# Altium PCB dv_power.PcbDoc
Units mm, origin at the board's own origin, x right, y up, seen from the top; angles counter-clockwise.
Board outline 86 x 62 mm, 4 copper layers (Top Layer, Ground, Power, Bottom Layer), stack 1.781 mm thick; 25 components, 23 nets, 162 pads, 67 vias.
Unrouted connection lines stored in the file: 13.
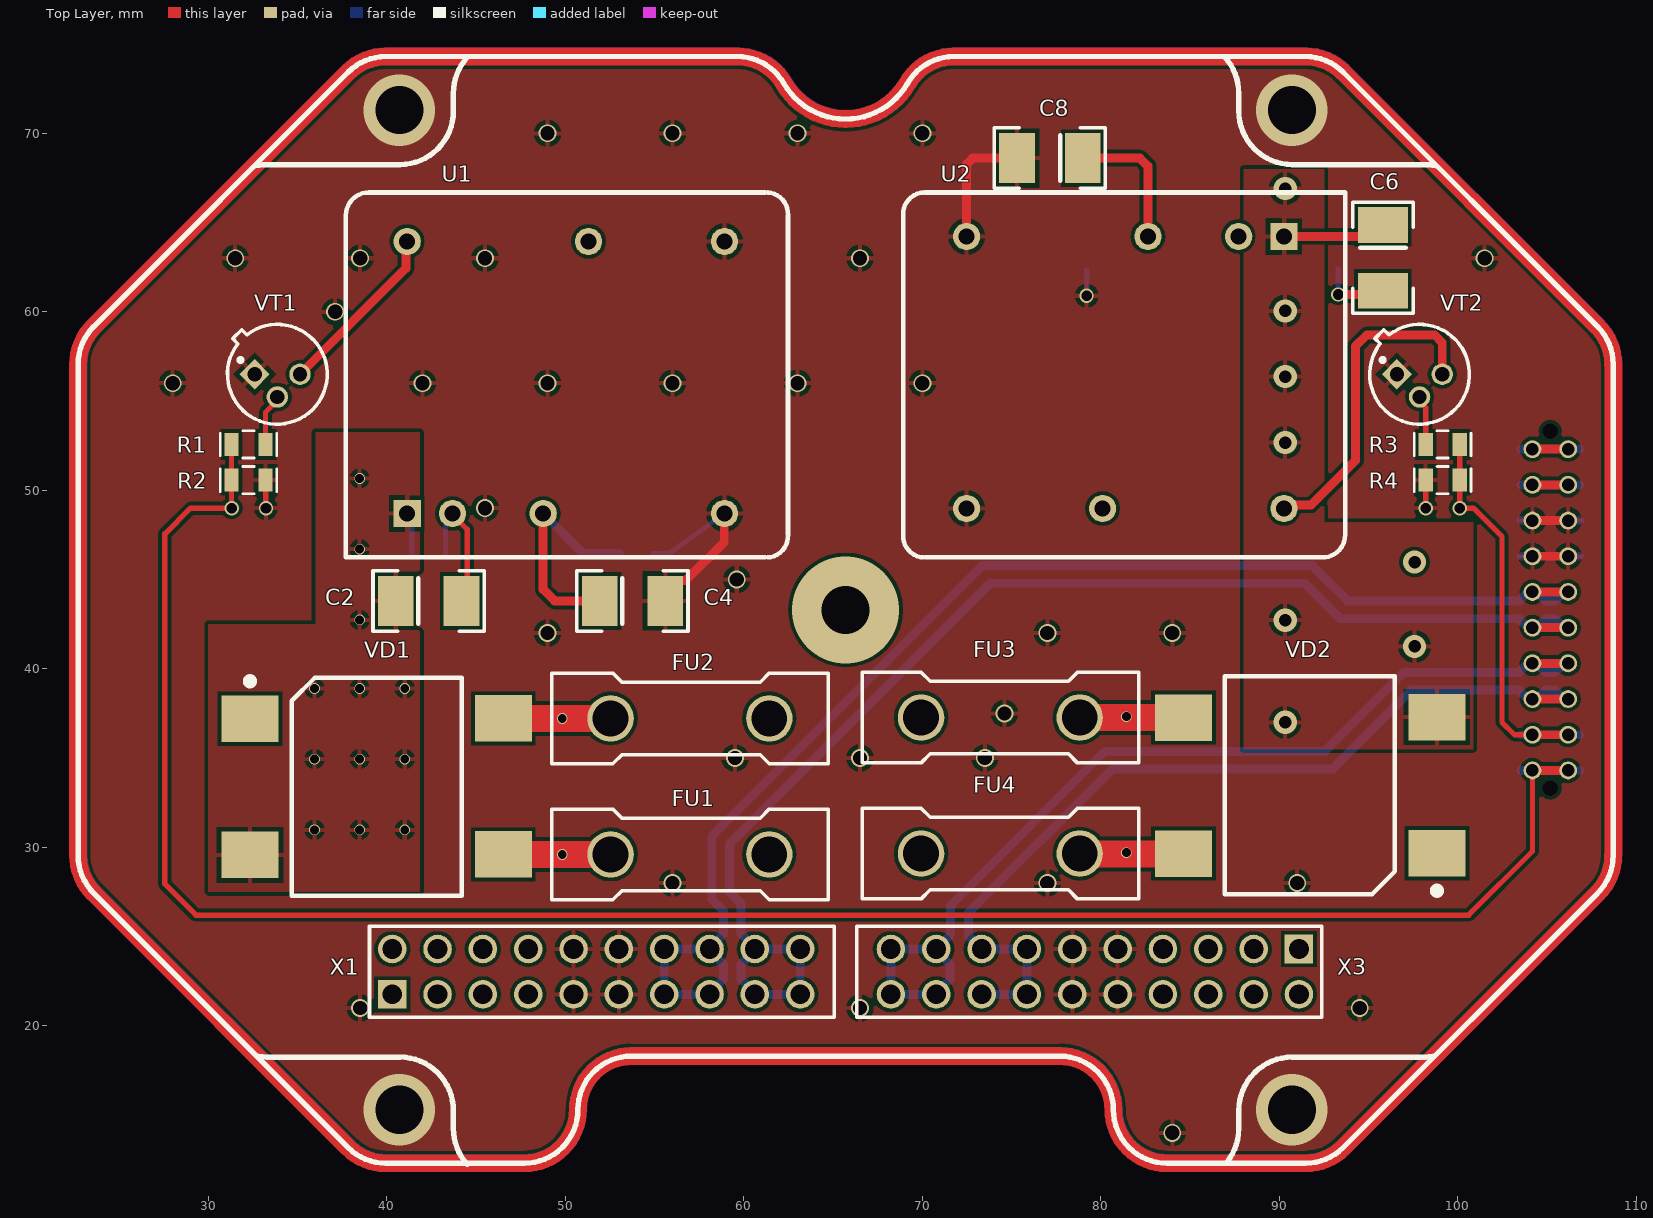
[diagram p0: Top Layer view]
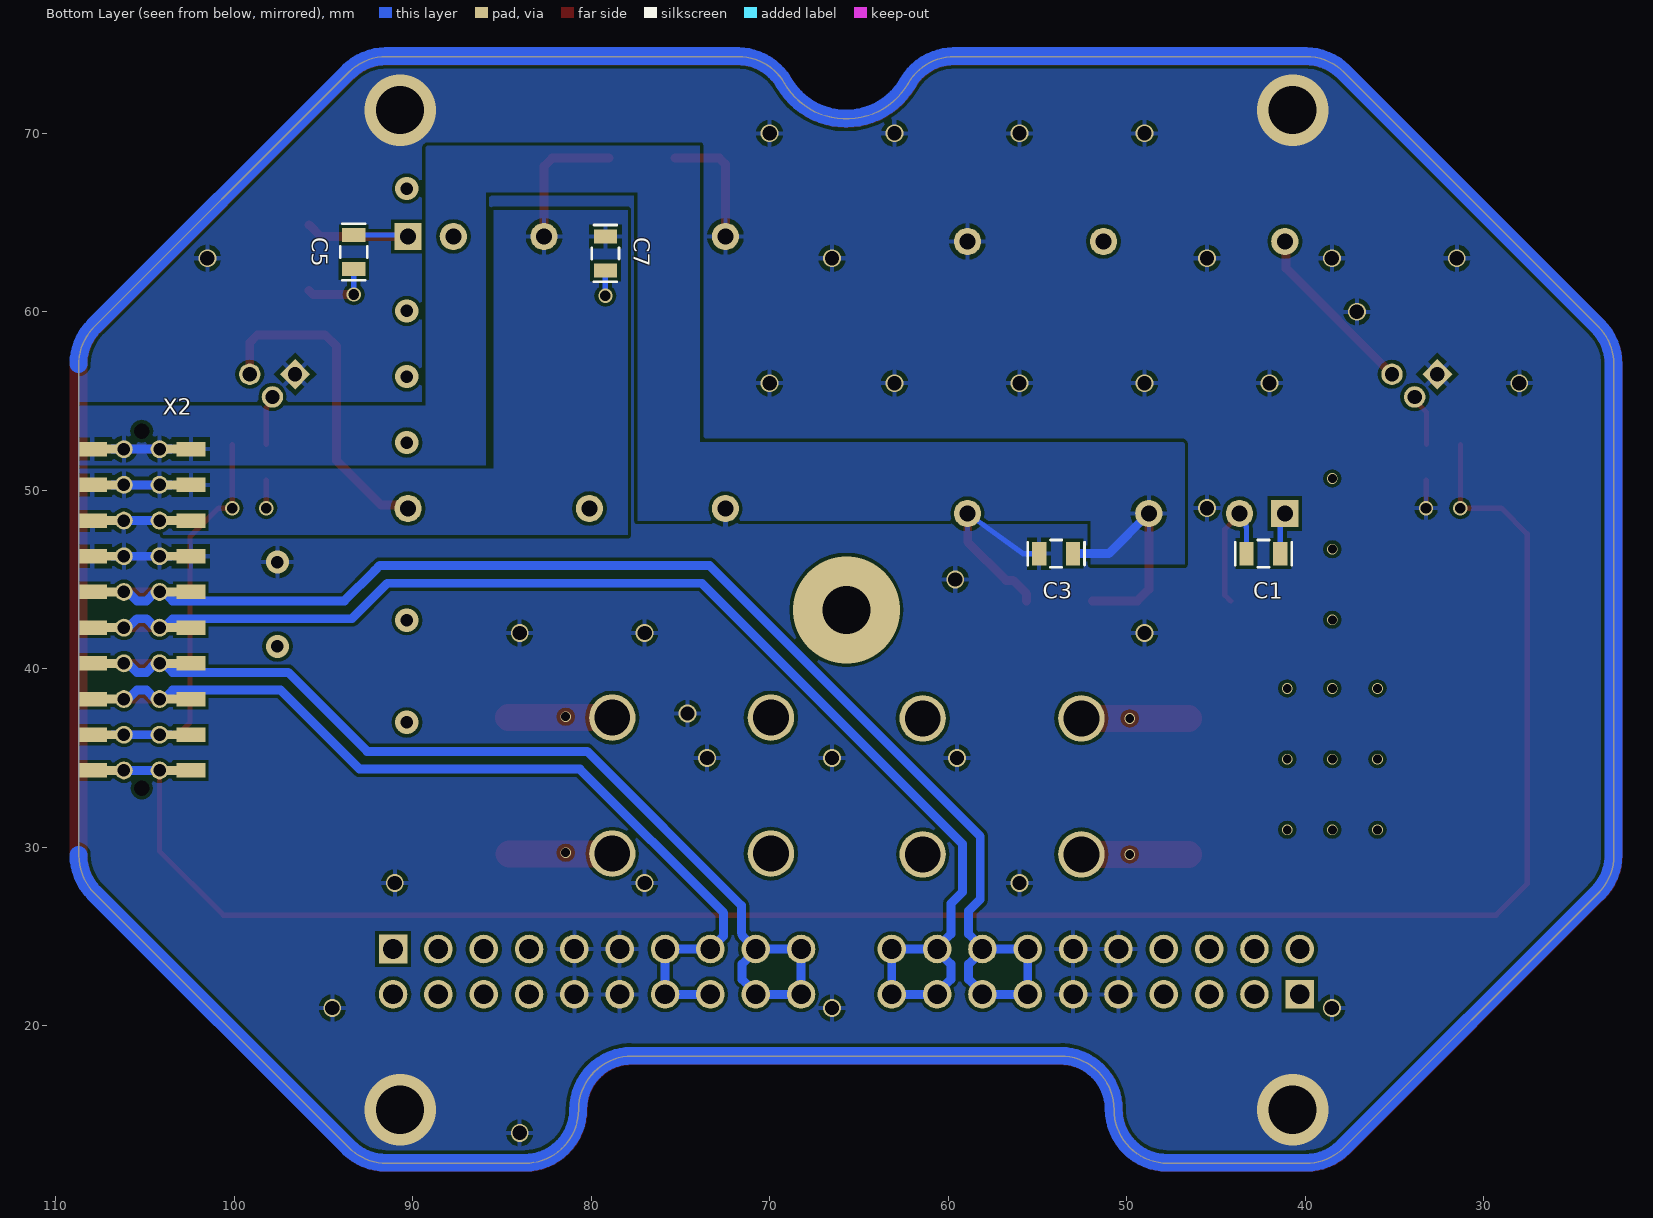
[diagram p1: Bottom Layer view, seen from below]
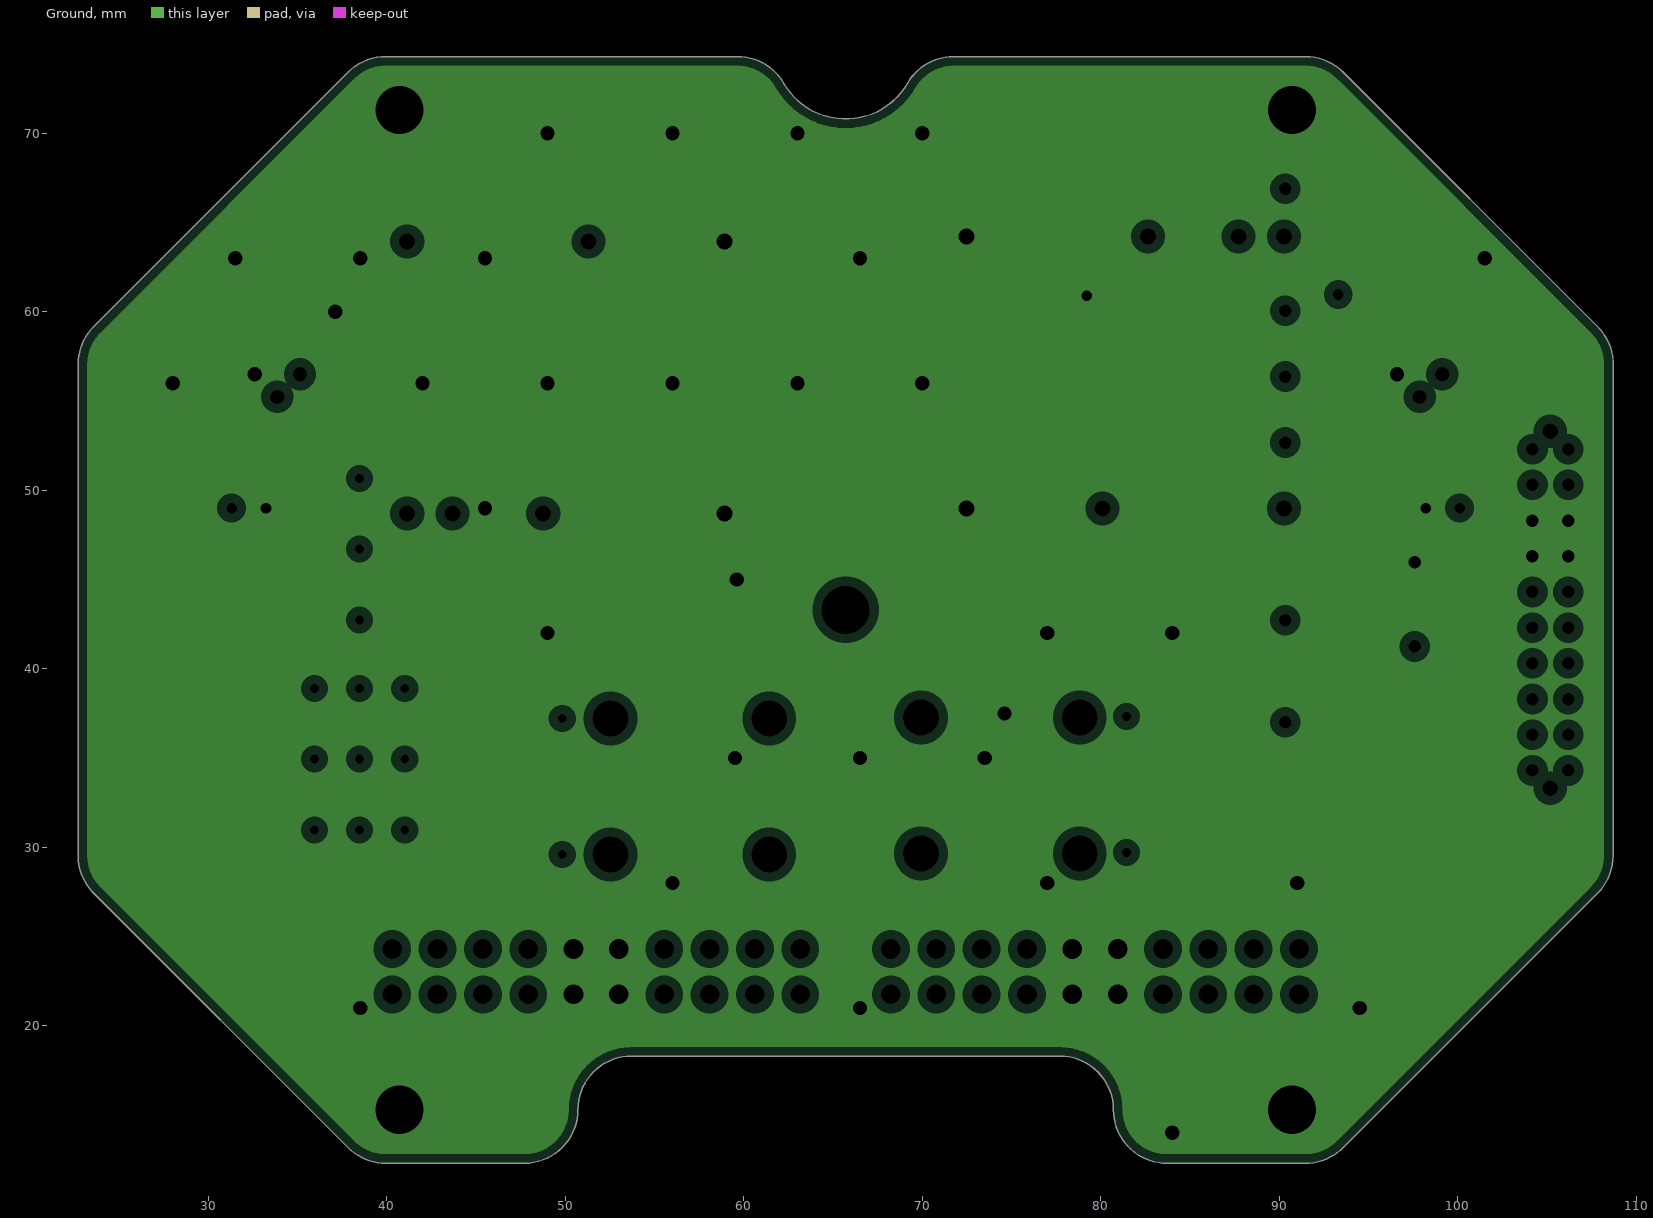
[diagram p2: Ground, clearances drawn from the general rule]
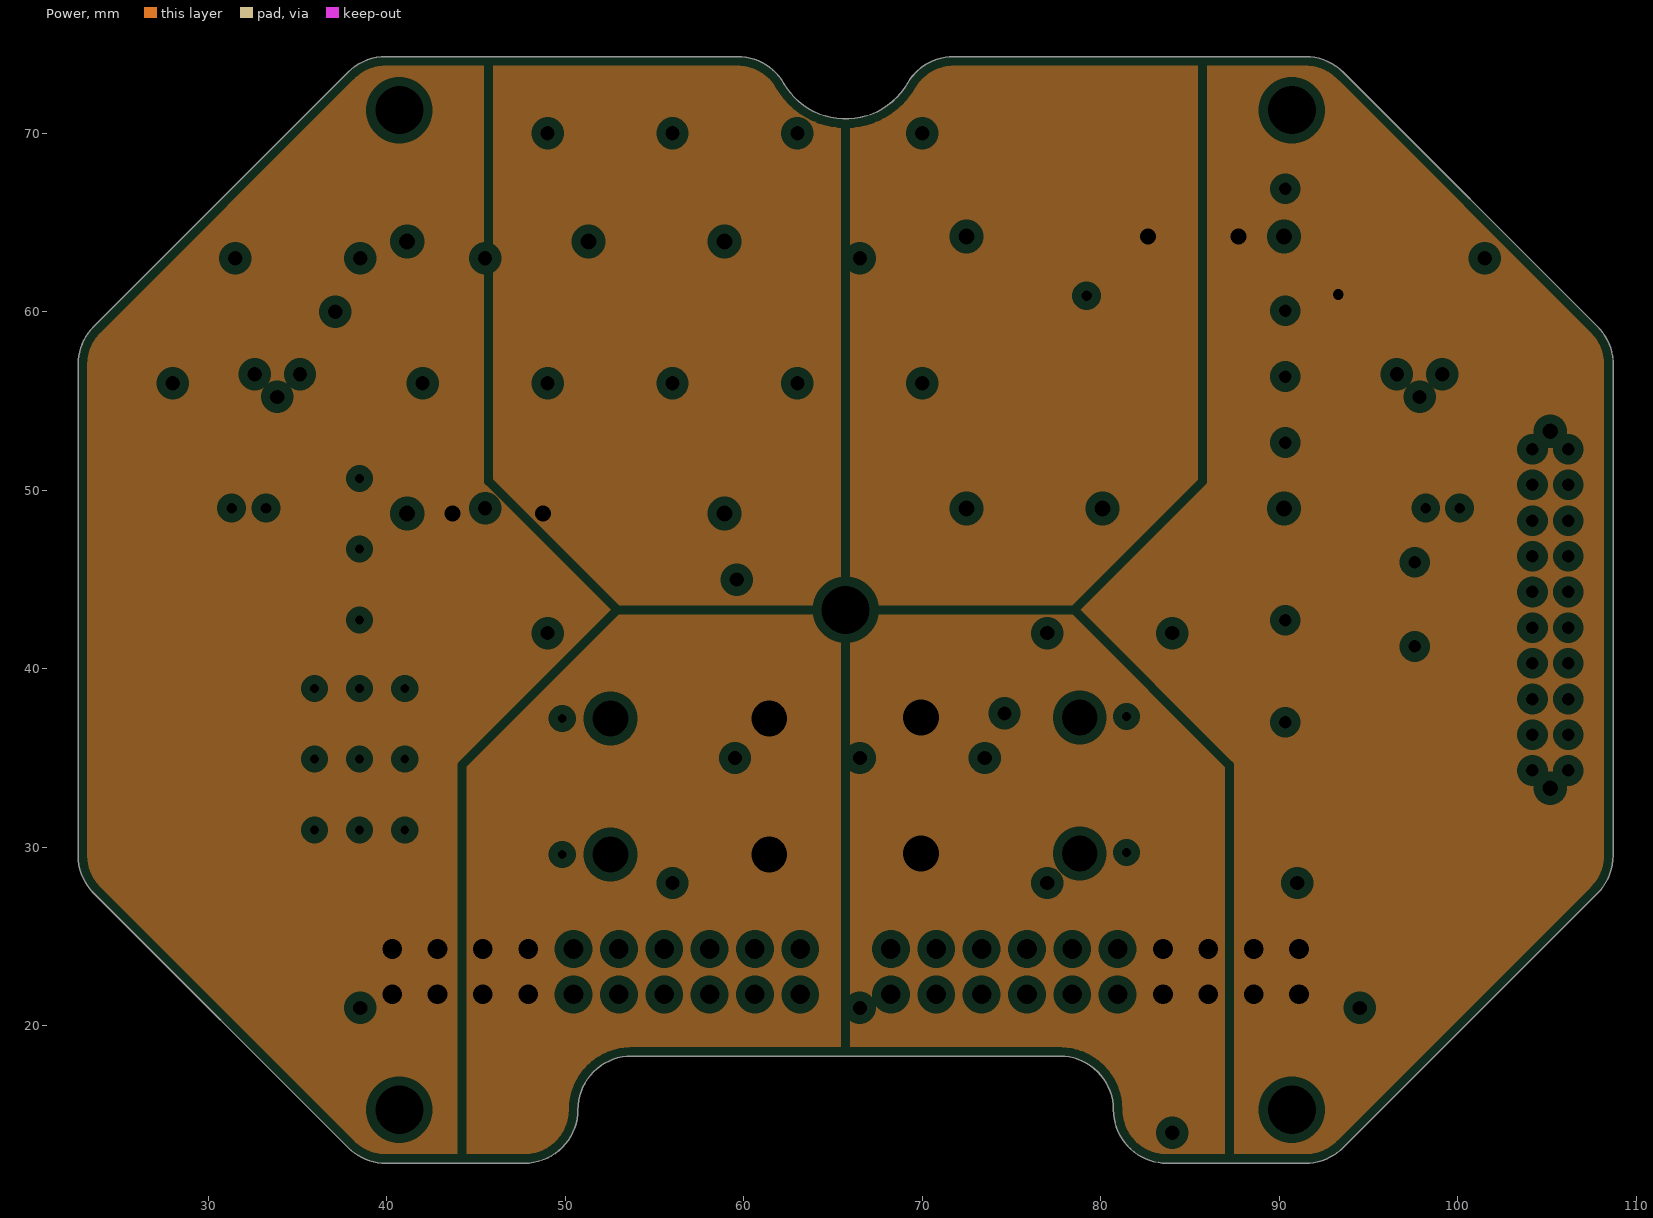
[diagram p3: Power, clearances drawn from the general rule]
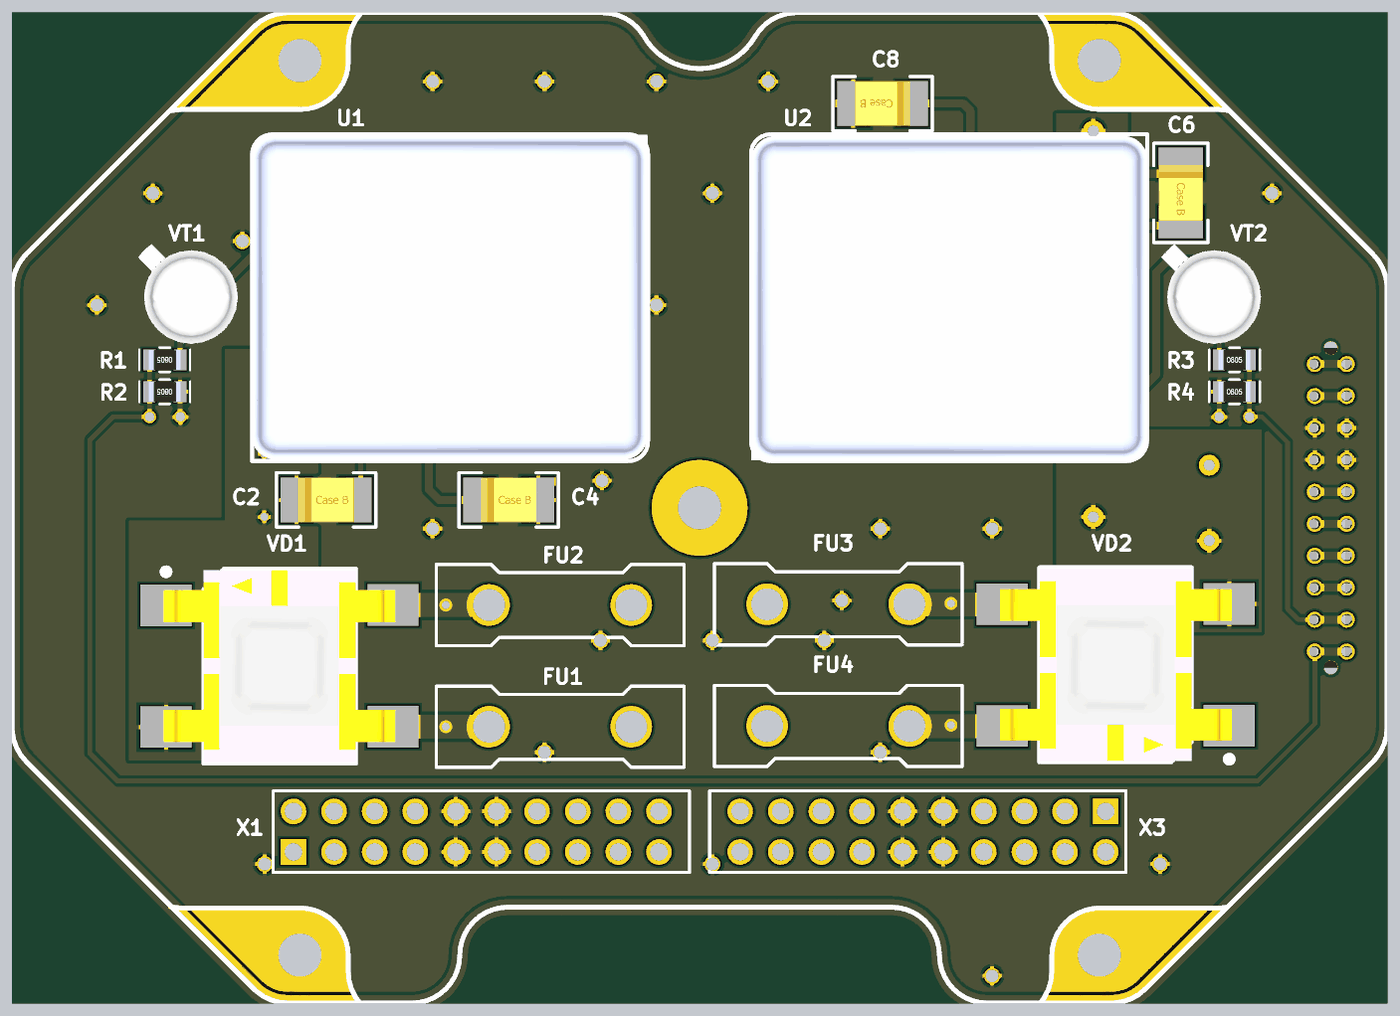
[diagram p4: 3D render of the assembled board from above, using the file's embedded part models]
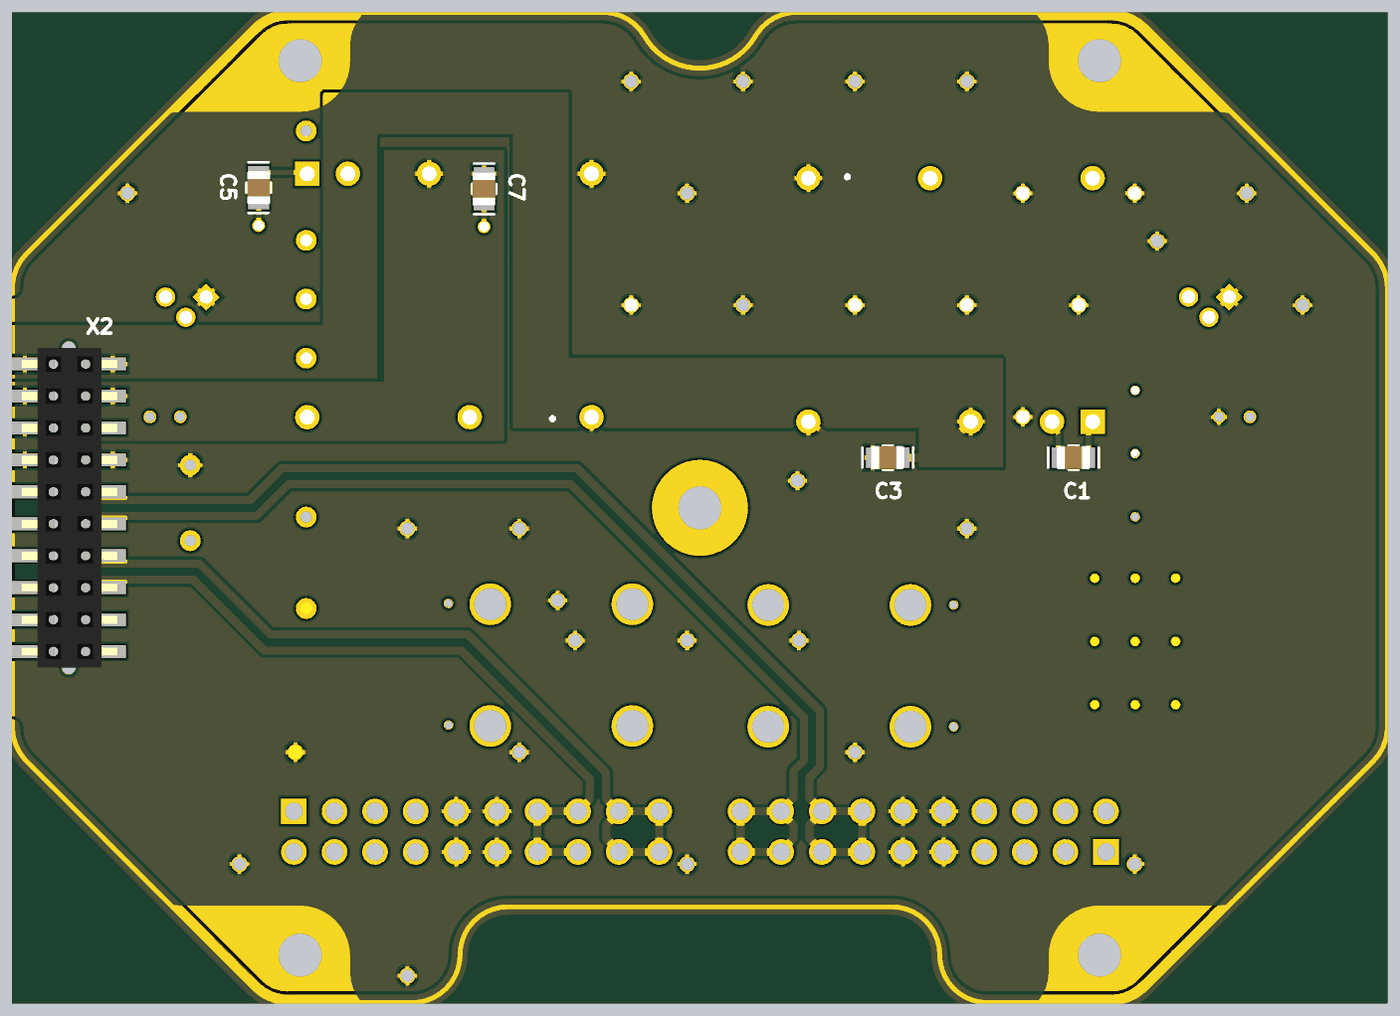
[diagram p5: 3D render of the assembled board from below, using the file's embedded part models]

## Layer stack, top to bottom
Top Solder: solder mask 0.0254, SM-001, Dk 4
Top Layer: signal copper 0.035
Dielectric 2: prepreg 0.0711, PP-006, Dk 4.1
Ground: plane copper 0.035, net GND
Dielectric 1: core 1.4986, Core-043, Dk 4.3
Power: plane copper 0.035, net (Multiple Nets)
Dielectric 3: prepreg 0.0711, PP-006, Dk 4.1
Bottom Layer: signal copper 0.035
Bottom Solder: solder mask 0.0254, SM-001, Dk 4

## Board outline
39.943,12.3 47.7,12.3 ccw(c47.7,15.3) 50.7,15.3 cw(c53.7,15.3) 53.7,18.3 77.7,18.3 cw(c77.7,15.3) 80.7,15.3 ccw(c83.7,15.3) 83.7,12.3 91.457,12.3 ccw(c91.457,15.3) 93.579,13.179 107.821,27.421 ccw(c105.7,29.543) 108.7,29.543 108.7,57.057 ccw(c105.7,57.057) 107.821,59.179 93.579,73.421 ccw(c91.457,71.3) 91.457,74.3 71.762,74.3 ccw(c71.762,71.3) 69.164,72.8 cw(c65.7,74.8) 62.236,72.8 ccw(c59.638,71.3) 59.638,74.3 39.943,74.3 ccw(c39.943,71.3) 37.821,73.421 23.579,59.179 ccw(c25.7,57.057) 22.7,57.057 22.7,29.543 ccw(c25.7,29.543) 23.579,27.421 37.821,13.179 ccw(c39.943,15.3)

## Design rules (kind name [scope] priority, off if disabled: settings)
Clearance [All] p1: gap=0.2 ignorepadtopadclearanceinfootprint=FALSE
ComponentClearance [All] p1: gap=0 collisioncheckmode=3 verticalgap=0.2 showdistances=FALSE
DiffPairsRouting [All] p1: maxlimit=0.5 minlimit=0.2 mostfreqgap=0.3 toplayer_minwidth=0.2 toplayer_maxwidth=1 toplayer_prefwidth=0.3 bottomlayer_minwidth=0.2 bottomlayer_maxwidth=1 bottomlayer_prefwidth=0.3 maxuncoupledlength=10
HoleSize [All] p1: absolutevalues=TRUE maxlimit=7 minlimit=0.5 maxpercent=80.000 minpercent=20.000
NetAntennae [All] p1 off: netantennaetolerance=0
PlaneClearance [All] p1: clearance=0.508
PlaneConnect [All] p1: planeconnectstyle=Relief reliefexpansion=0.508 reliefentries=4 reliefconductorwidth=0.254 reliefairgap=0.254
PolygonConnect "Mechanical Hole" [(ObjectKind = 'Via') And (AsMM(HoleDiameter) > 1.5) vs IsPoly] p1: connectstyle=Direct reliefconductorwidth=0.254 reliefentries=4 polygonreliefangle="90 Angle" airgapwidth=0.254
PolygonConnect [All] p2: connectstyle=Relief reliefconductorwidth=0.254 reliefentries=4 polygonreliefangle="90 Angle" airgapwidth=0.254
RoutingVias [All] p1: holewidth=0.3 width=0.6 viastyle="Through Hole" minholewidth=0.2 minwidth=0.4 maxholewidth=4 maxwidth=5 useviatemplates=TRUE viatemplateguid#1={8CC3DEFE-2846-4DFB-9B77-7EB525941536} viatemplatename#1=v80h60
SilkToSilkClearance [All] p1: silktosilkclearance=0.2
SilkToSolderMaskClearance SilkToSolderMaskClearance_1 [IsPad] p1: minsilkscreentomaskgap=0.254 clearancetoexposedcopper=TRUE
SilkToSolderMaskClearance [IsPad] p2: minsilkscreentomaskgap=0.2 clearancetoexposedcopper=TRUE
SolderMaskExpansion [All] p1: expansion=0.102 istentingtop=FALSE
Width [All] p1: maxlimit=2 minlimit=0.2 preferedwidth=0.2
22 further rules are at their usual default settings.

## Classes and differential pairs
net class pwr_en[1..2]: pwr_en1 pwr_en2
net class -27V[1..2]: -27V1 -27V2
net class +27V[1..2]: +27V1 +27V2
net class +5V[1..2]: +5V1 +5V2
channel class dv_power_chanel: dv_power_chanel1 dv_power_chanel2
component class dv_power_chanel2: C5 C6 C7 C8 FU3 FU4 R3 R4 U2 VD2 VT2
component class dv_power_chanel1: C1 C2 C3 C4 FU1 FU2 R1 R2 U1 VD1 VT1
component class dv_power: X1 X2 X3
differential pair 1-РЕЗ: +1-РЕЗ-П -1-РЕЗ-О
differential pair 1-ОСН: +1-ОСН-П -1-ОСН-О

## Components (designator, comment, footprint, x,y, rotation, side; value= is the part's Value field where it differs from the comment)
C1 "K10-79" SMD_C0805 43.286,46.45 r180 bottom value=0,1мкФ
C2 "OS K53-68" SMD_size_B 40.492,43.8 r0 top value=10мкФх50В
C3 "K10-79" SMD_C0805 54.9,46.45 r180 bottom value=0,1мкФ
C4 "OS K53-68" SMD_size_B 51.917,43.8 r0 top value=10мкФх50В
C5 "K10-79" SMD_C0805 93.3,62.4 r90 bottom value=0,1мкФ (schematic designator C1)
C6 "OS K53-68" SMD_size_B 95.8,64.865 r270 top value=10мкФх50В (schematic designator C2)
C7 "K10-79" SMD_C0805 79.2,62.319 r90 bottom value=0,1мкФ (schematic designator C3)
C8 "OS K53-68" SMD_size_B 78.983,68.61 r180 top value=10мкФх50В (schematic designator C4)
FU1 "VP1-2" VP1-2 61.422,29.6 r180 top value=0.25A
FU2 "VP1-2" VP1-2 61.422,37.22 r180 top value=0.25A
FU3 "VP1-2" VP1-2 69.925,37.267 r0 top value=0.25A (schematic designator FU1)
FU4 "VP1-2" VP1-2 69.925,29.647 r0 top value=0.25A (schematic designator FU2)
R1 "OSM R1-12" SMD_0805 33.195,52.569 r180 top value=1к
R2 "OSM R1-12" SMD_0805 33.195,50.569 r180 top value=1к
R3 "OSM R1-12" SMD_0805 98.199,52.569 r0 top value=1к (schematic designator R1)
R4 "OSM R1-12" SMD_0805 98.199,50.569 r0 top value=1к (schematic designator R2)
U1 "SMPV 1.5 5.0 OV" SLH28xx 41.136,48.7 r90 top
U2 "SMPV 1.5 5.0 OV" SLH28xx 90.258,64.219 r270 top (schematic designator U1)
VD1 "2D222VS \"OSM\"" 4116.4-3_offcut 32.325,37.2 r0 top
VD2 "2D222VS \"OSM\"" 4116.4-3_offcut 98.825,29.667 r180 top (schematic designator VD1)
VT1 "2T3117A" TO-18 32.592,56.5 r0 top
VT2 "2T3117A" TO-18 96.584,56.5 r0 top (schematic designator VT1)
X1 "Header 2X20" PBD-20 40.297,21.76 r0 top
X2 "Header 2X20" SD87340-20 102.428,52.304 r180 bottom
X3 "Header 2X20" PBD-20 91.097,24.3 r180 top

## Footprints (in the part's own frame and the unit in brackets; to place one, negate y for a bottom-side part, rotate by r counter-clockwise, add the part's x,y. Pads: shape width x height; smd on the part's side, far side on the other; paste and mask are expansions set on the pad)
4116.4-3_offcut [mm]
  rect 3.2x2.6 smd: 2(0,0) 8(0,-7.62) 11(14.2,-7.6) 17(14.2,0.02)
  silkscreen extent -0.2,-9.91 11.88,2.3, body extent -0.15,-9.8 14.35,2.2, height 3.35
PBD-20 [mm]
  rect 1.6x1.6 hole 1.1: 1(0,0)
  round 1.6 hole 1.1: 2(0,2.54) 3(2.54,0) 4(2.54,2.54) 5(5.08,0) 6(5.08,2.54) 7(7.62,0) 8(7.62,2.54) 9(10.16,0) 10(10.16,2.54) 11(12.7,0) 12(12.7,2.54) 13(15.24,0) 14(15.24,2.54) 15(17.78,0) 16(17.78,2.54) 17(20.32,0) 18(20.32,2.54) 19(22.86,0) 20(22.86,2.54)
  silkscreen extent -1.27,-1.28 24.76,3.82
SD87340-20 [mm]
  round 0 hole 0.85: 0(-2.75,-19) 0(-2.75,1)
  round 1 hole 0.7: 1(-1.75,0) 2(-3.75,0) 3(-1.75,-2) 4(-3.75,-2) 5(-1.75,-4) 6(-3.75,-4) 7(-1.75,-6) 8(-3.75,-6) 9(-1.75,-8) 10(-3.75,-8) 11(-1.75,-10) 12(-3.75,-10) 13(-1.75,-12) 14(-3.75,-12) 15(-1.75,-14) 16(-3.75,-14) 17(-1.75,-16) 18(-3.75,-16) 19(-1.75,-18) 20(-3.75,-18)
  rect 1.5x0.5 smd: 1(-1.1,0) 2(-4.4,0) 3(-1.1,-2) 4(-4.4,-2) 5(-1.1,-4) 6(-4.4,-4) 7(-1.1,-6) 8(-4.4,-6) 9(-1.1,-8) 10(-4.4,-8) 11(-1.1,-10) 12(-4.4,-10) 13(-1.1,-12) 14(-4.4,-12) 15(-1.1,-14) 16(-4.4,-14) 17(-1.1,-16) 18(-4.4,-16) 19(-1.1,-18) 20(-4.4,-18)
  rect 1.626x0.813 smd: 1(0,0) 2(-5.5,0) 3(0,-2) 4(-5.5,-2) 5(0,-4) 6(-5.5,-4) 7(0,-6) 8(-5.5,-6) 9(0,-8) 10(-5.5,-8) 11(0,-10) 12(-5.5,-10) 13(0,-12) 14(-5.5,-12) 15(0,-14) 16(-5.5,-14) 17(0,-16) 18(-5.5,-16) 19(0,-18) 20(-5.5,-18)
  body extent -5.7,-19 0.3,1, height 2.1
SLH28xx [mil]
  rect 60x60 hole 35.43: 1(0,0)
  round 60 hole 35.43: 2(0,-100) 3(0,-300) 4(0,-700) 5(600,-700) 6(600,-400) 7(600,0)
  silkscreen extent -97,-840 708,135, body extent -93,-839 707,136, height 275
SMD_0805 [mm]
  rect 0.8x1.3 smd: 1(0,0) 2(1.9,0)
  silkscreen extent -0.64,-0.76 2.54,0.76, body extent -0.05,-0.62 1.95,0.63, height 0.43
SMD_C0805 [mm]
  rect 0.8x1.3 smd: 1(0,0) 2(1.9,0)
  silkscreen extent -0.64,-0.76 2.54,0.76, body extent -0.1,-0.72 2,0.73, height 1.35
SMD_size_B [mm]
  rect 2x2.8 smd: 1(0,0) 2(3.683,0)
  silkscreen extent -1.27,-1.7 4.95,1.7, body extent 0.1,-1.4 3.6,1.4, height 1.9
TO-18 [mm]
  rect 1.2x1.2 hole 0.8 rot 45: 1(0,0)
  round 1.2 hole 0.8: 2(1.27,-1.27) 3(2.54,0)
  silkscreen extent -1.52,-2.79 4.06,2.79, body extent -2.01,-2.93 4.23,3.31, height 5.43
VP1-2 [mm]
  round 2.6 hole 2: 1(0,0) 2(8.89,0)
  silkscreen extent -3.3,-2.54 12.19,2.54, body extent -3.18,-2.41 12.06,2.41, height 4.68

## Part data
C1 C3 C5 C7: library part Capacitor, "Capacitor", Назначение=SMD-конденсатор, Наименование=К10-79, Напряжение=В, Потребление, Вт=0, Точность=%
C2 C4 C6 C8: library part Capacitor_pol, "Polarized capacitor", Назначение="Поляризованный SMD-конденсатор", Наименование="ОС К53-68", Потребление, Вт=0
FU1 FU2 FU3 FU4: "Предохранитель плавкий", ComponentLink1Description=DataSheet, ComponentLink1URL=https://docviewer.yandex.ru/view/20572601/?page=1&*=oYyHA%2BCwzeyRvrmOJV6%2ByaBlbHJ7InVybCI6Imh0dHBzOi8vZWwtcmEucnUvdXBsb2FkL2libG9jay8wMTYvdnN0YXZrYS1wbGF2a2EtdnAxXzItX2VsZWt0cm9uaWthX3JhXy5wZGYiLCJ0aXRsZSI6InZzdGF2a2EtcGxhdmthLXZwMV8yLV9lbGVrdHJvbmlrYV9yYV8ucGRmIiwibm9pZnJhbWUiOnRydWUsInVpZCI6IjIwNTcyNjAxIiwidHMiOjE1OTI0NzI0NTM1MTUsInl1IjoiODg5MDYxMzMxNTQzMzg3MTIxIiwic2VycFBhcmFtcyI6Imxhbmc9cnUmdG09MTU5MjQ3MjQyOCZ0bGQ9cnUmbmFtZT12c3RhdmthLXBsYXZrYS12cDFfMi1fZWxla3Ryb25pa2FfcmFfLnBkZiZ0ZXh0PSVEMCVCMiVEMCVCRjEtMiZ1cmw9aHR0cHMlM0EvL2VsLXJhLnJ1L3VwbG9hZC9pYmxvY2svMDE2L3ZzdGF2a2EtcGxhdmthLXZwMV8yLV9lbGVrdHJvbmlrYV9yYV8ucGRmJmxyPTY1Jm1pbWU9cGRmJmwxMG49cnUmc2lnbj0yZWMwNDRiZDQyMGRlMjRmMjI1MThkNTc4YjZlMTlkYiZrZXlubz0wIn0%3D&lang=ru, Назначение="Предохранитель плавкий", Наименование="ВП1-2 \"ВП\""
R1 R2 R3 R4: library part Resistor, "Resistor", Назначение=SMD-резистор, Наименование="ОСМ Р1-12", Потребление, Вт=0,001, Точность=%
U1 U2: library part SLH28xx, "DC-DC", ComponentLink1Description=DataSheet, ComponentLink1URL=https://www.interpoint.com/product_documents/SLH_Space_DC_DC_Converters.pdf, Назначение="DC-DC преобразователь", Наименование="СМПВ 1.5 5.0 ОВ", Потребление, Вт=0.1
VD1 VD2: library part 2D222, "Сдвоенный диод", ComponentLink1Description=DataSheet, ComponentLink1URL=https://eandc.ru/pdf/diod/2d222.pdf, Назначение="Сдвоенный диод", Наименование="2Д222ВС ОСМ", Потребление, Вт=0,004
VT1 VT2: "Кремниевый биполярный / эпитаксиально-планарный / n-p-n транзистор", ComponentLink1Description=DataSheet, ComponentLink1URL=https://www.integral.by/sites/default/files/pdf/2t3117.pdf, Назначение="Биполярный транзистор", Наименование="2Т3117А/ПК \"ОСМ\"", Потребление, Вт=0,0
X1 X2 X3: "Header, 20-Pin, Dual row", Назначение="Header, 20-Pin, Dual row", Потребление, Вт=0,0
  X1 X3: Наименование=PLD-20
  X2: Наименование=PLD2-20

## Via types
v1: diameter 1, hole 0.8, Top Layer to Bottom Layer, 32 vias
v2: diameter 0.6, hole 0.5, Top Layer to Bottom Layer, 16 vias
v3: diameter 1.3, hole 0.7, Top Layer to Bottom Layer, 8 vias
v4: diameter 0.8, hole 0.6, Top Layer to Bottom Layer, 6 vias
v5: diameter 4, hole 2.7, Top Layer to Bottom Layer, 4 vias
v6: diameter 6, hole 2.7, Top Layer to Bottom Layer, 1 vias

## Nets (pads, with @x,y where several pads share a name; then routed paths per layer and width w, separated by ;. In a path a pad name is that pad's centre, name@x,y a point inside that pad or via, vN(x,y) a via of type N, cw(c..) or ccw(c..) an arc to the next point about the centre after c; other vN are vias at no path point)
1-ОСН-О: X1.13 X1.14 X1.15 X1.16 X2.9 X2.10 | length 75.4
  Top Layer w0.5: X2.9@104.178,44.304 X2.10@106.178,44.304
  Bottom Layer w0.5: X2.10@106.178,44.304 105.95,44.304 105.45,43.804 104.907,43.804 104.407,44.304 103.95,44.304 103.45,43.804 93.821,43.804 92.125,45.5 91.832,45.793 73.379,45.793 58.2,30.614 58.2,27.079 58.847,26.432 58.847,25.143 58.077,24.373 X1.16 ; X1.16 58.077,24.227 58.847,23.457 58.847,22.603 58.077,21.833 X1.15 X1.13 X1.14 X1.16
1-ОСН-П: X1.17 X1.18 X1.19 X1.20 X2.11 X2.12 | length 73.8
  Top Layer w0.5: X2.11@104.178,42.304 X2.12@106.178,42.304
  Bottom Layer w0.5: X2.12@106.178,42.304 105.95,42.304 105.45,42.804 104.907,42.804 104.407,42.304 103.95,42.304 103.45,42.804 93.407,42.804 91.418,44.793 73.793,44.793 59.2,30.2 59.2,27.494 59.847,26.846 59.847,25.143 60.617,24.373 X1.18 ; X1.18 60.617,24.227 59.847,23.457 59.847,22.603 60.617,21.833 X1.17 X1.19 X1.20 X1.18
1-РЕЗ-О: X2.13 X2.14 X3.17 X3.18 X3.19 X3.20 | length 56.2
  Top Layer w0.5: X2.13@104.178,40.304 X2.14@106.178,40.304
  Bottom Layer w0.5: X2.14@106.178,40.304 105.95,40.304 105.45,39.804 104.907,39.804 104.407,40.304 103.95,40.304 103.45,39.804 96.979,39.804 92.55,35.375 80.219,35.375 71.582,26.738 71.582,26.303 71.571,26.292 71.571,25.249 71.525,25.048 X3.17 ; X3.17 70.777,24.227 71.547,23.457 71.547,22.603 70.777,21.833 X3.18 X3.20 X3.19 X3.17
1-РЕЗ-П: X2.15 X2.16 X3.13 X3.14 X3.15 X3.16 | length 51.3
  Top Layer w0.5: X2.15@104.178,38.304 X2.16@106.178,38.304
  Bottom Layer w0.5: X3.16 X3.14 X3.13 X3.15 72.591,25.026 72.591,25.265 72.592,25.272 72.592,25.899 72.582,25.909 72.582,26.323 80.633,34.375 92.964,34.375 97.393,38.804 103.45,38.804 103.95,38.304 104.407,38.304 104.907,38.804 105.45,38.804 105.95,38.304 X2.16@106.178,38.304
+5V1: C3.2 C4.1 U1.3 X2.1 X2.2 | length 18.2
  Top Layer w0.5: U1.3 48.756,44.444 49.4,43.8 C4.1 ; X2.1@104.178,52.304 X2.2@106.178,52.304
  Bottom Layer w0.5: U1.3 51.006,46.45 C3.2 ; X2.1@103.528,52.304 X2.2@106.828,52.304
+5V2: C7.2 C8.1 U2.3 X2.3 X2.4 | length 13.1
  Top Layer w0.5: C8.1 82.19,68.61 82.638,68.162 U2.3 ; X2.3@104.178,50.304 X2.4@106.178,50.304
  Bottom Layer w0.5: X2.3@103.528,50.304 X2.4@106.828,50.304
+27V1: FU1.1 FU2.1 X1.5 X1.6 X1.7 X1.8
+27V2: FU3.1 FU4.1 X3.5 X3.6 X3.7 X3.8
-27V1: C1.1 C2.2 U1.2 X1.1 X1.2 X1.3 X1.4 | length 7.7
  Top Layer w0.3: U1.2 43.676,48.634 44.5,47.81 44.5,44.125 C2.2
  Bottom Layer w0.3: C1.1 43.286,47.759 cw(c44.617,47.759) U1.2
-27V2: C5.1 C6.2 U2.2 X3.1 X3.2 X3.3 X3.4 | length 4
  Top Layer w0.5: v4(93.3,60.975) 95.593,60.975 C6.2
  Bottom Layer w0.3: v4(93.3,60.975) C5.1
GND: C3.1 C4.2 C7.1 C8.2 R2.1 R4.1 U1.4 U1.5 U2.4 U2.5 VT1.1 VT2.1 X1.9 X1.10 X1.11 X1.12 X2.5 X2.6 X2.7 X2.8 X3.9 X3.10 X3.11 X3.12 | length 33.4
  Top Layer w0.3: R2.1 33.21,50.554 33.21,49.015 v4(33.225,49) ; v4@98.199,49.001 R4.1
  Top Layer w0.5: C4.2 55.6,44.2 56.35,44.95 56.75,44.95 58.9,47.1 58.9,48.684 U1.4 ; U2.4 72.478,68.278 72.81,68.61 C8.2 ; X2.7@104.178,46.304 X2.8@106.178,46.304 ; X2.5@104.178,48.304 X2.6@106.178,48.304
  Bottom Layer w0.3: C3.1 55.783,46.45 U1.4 ; v4(79.2,60.9) C7.1
  Bottom Layer w0.5: X2.7@103.528,46.304 X2.8@106.828,46.304 ; X2.5@103.528,48.304 X2.6@106.828,48.304
  other v1: 84,14 38.5,21 66.5,21 94.5,21 56,28 77,28 91,28 59.5,35 66.5,35 73.5,35 74.6,37.5 49,42 77,42 84,42 59.6,45 45.5,49 28,56 42,56 49,56 56,56 63,56 70,56 37.1,60 31.5,63 38.5,63 45.5,63 66.5,63 101.5,63 49,70 56,70 63,70 70,70
  other v3: 97.575,45.975
  other v4: 98.2,49
  other v5: 40.7,15.3 90.7,15.3 40.7,71.3 90.7,71.3
NetC1_2: C1.2 C2.1 U1.1 VD1.8 | length 2.4
  Bottom Layer w0.3: U1.1 41.386,48.45 C1.2
  other v2: 35.945,30.98 38.472,30.98 41,30.98 35.945,34.94 38.472,34.94 41,34.94 35.945,38.9 38.472,38.9 41,38.9 38.472,42.74 38.472,46.7 38.472,50.66
NetC5_2: C5.2 C6.1 U2.1 VD2.8 | length 8.9
  Top Layer w0.5: U2.1 95.155,64.219 C6.1
  Bottom Layer w0.3: U2.1@90.339,64.3 C5.2
  Bottom Layer w0.5: U2.1 U2.1@90.339,64.3
  other v3: 90.325,37 97.575,41.25 90.325,42.725 90.325,52.675 90.325,56.375 90.325,60.05 90.325,66.9
NetFU1_2: FU1.2 VD1.11 | length 6
  Top Layer w1.5: VD1.11 FU1.2
  other v2: 49.825,29.6
NetFU2_2: FU2.2 VD1.17 | length 6
  Top Layer w1.5: VD1.17 FU2.2
  other v2: 49.825,37.22
NetFU3_2: FU3.2 VD2.11 | length 5.8
  Top Layer w1.5: FU3.2 VD2.11
  other v2: 81.425,37.32
NetFU4_2: FU4.2 VD2.17 | length 5.8
  Top Layer w1.5: FU4.2@78.838,29.623 VD2.17@84.601,29.623
  other v2: 81.425,29.7
NetR1_1: R1.1 VT1.2 | length 2.9
  Top Layer w0.3: R1.1 33.195,54.374 33.862,55.041 VT1.2
NetR3_1: R3.1 VT2.2 | length 2.8
  Top Layer w0.3: VT2.2 97.854,54.986 98.199,54.641 R3.1
NetU1_7: U1.7 VT1.3 | length 9.9
  Top Layer w0.5: VT1.3 41.06,62.428 41.06,63.864 U1.7
NetU2_7: U2.7 VT2.3 | length 18.6
  Top Layer w0.5: U2.7 90.448,49.169 91.77,49.169 94.263,51.662 94.263,58.063 94.9,58.7 98.693,58.7 99.124,58.269 VT2.3
pwr_en1: R1.2 R2.2 X2.19 X2.20 | length 116.2
  Top Layer w0.3: R1.2 R2.2 31.295,49 29,49 27.559,47.559 27.559,27.941 29.3,26.2 100.6,26.2 104.178,29.778 X2.19@104.178,34.304
  Top Layer w0.5: X2.19@104.178,34.304 X2.20@106.178,34.304
  Bottom Layer w0.5: X2.19@103.528,34.304 X2.20@106.828,34.304
  other v4: 31.3,49
pwr_en2: R3.2 R4.2 X2.17 X2.18 | length 24.4
  Top Layer w0.3: v4@100.099,49.001 R3.2 ; v4(100.1,49) 100.875,49 102.475,47.4 102.475,37 103.171,36.304 X2.17@104.178,36.304
  Top Layer w0.5: X2.17@104.082,36.4 104.178,36.304 X2.18@106.178,36.304
  Bottom Layer w0.5: X2.17@103.528,36.304 X2.18@106.828,36.304
pads on no net: U1.6 U2.6 VD1.2 VD2.2 X2.0
copper on no net: | length 506.2
  Top Layer w1: 108.7,29.543 cw(c105.7,29.543) 107.821,27.421 93.579,13.179 cw(c91.457,15.3) 91.457,12.3 83.7,12.3 cw(c83.7,15.3) 80.7,15.3 ccw(c77.7,15.3) 77.7,18.3 53.7,18.3 ccw(c53.7,15.3) 50.7,15.3 cw(c47.7,15.3) 47.7,12.3 39.943,12.3 cw(c39.943,15.3) 37.821,13.179 23.579,27.421 cw(c25.7,29.543) 22.7,29.543 22.7,57.057 cw(c25.7,57.057) 23.579,59.179 37.821,73.421 cw(c39.943,71.3) 39.943,74.3 59.638,74.3 cw(c59.638,71.3) 62.236,72.8 ccw(c65.7,74.8) 69.164,72.8 cw(c71.762,71.3) 71.762,74.3 91.457,74.3 cw(c91.457,71.3) 93.579,73.421 107.821,59.179 cw(c105.7,57.057) 108.7,57.057 ; 108.71,29.616 108.71,57.131
  Bottom Layer w1: 108.725,29.568 cw(c105.725,29.568) 107.846,27.446 93.604,13.204 cw(c91.482,15.325) 91.482,12.325 83.725,12.325 cw(c83.725,15.325) 80.725,15.325 ccw(c77.725,15.325) 77.725,18.325 53.725,18.325 ccw(c53.725,15.325) 50.725,15.325 cw(c47.725,15.325) 47.725,12.325 39.968,12.325 cw(c39.968,15.325) 37.846,13.204 23.604,27.446 cw(c25.725,29.568) 22.725,29.568 22.725,57.082 cw(c25.725,57.082) 23.604,59.204 37.846,73.446 cw(c39.968,71.325) 39.968,74.325 59.663,74.325 cw(c59.663,71.325) 62.261,72.825 ccw(c65.725,74.825) 69.189,72.825 cw(c71.787,71.325) 71.787,74.325 91.482,74.325 cw(c91.482,71.325) 93.604,73.446 107.846,59.204 cw(c105.725,57.082) 108.725,57.082
  other v6: 65.697,43.301

## Polygon pours and split planes (outlines as drawn)
GND on Top Layer "GND_L01_P024" (solid, remove dead copper, pour order 24): 59.995,74.37 cw(c59.995,71.83) 61.791,73.626 63.603,71.814 ccw(c65.399,73.61) 65.399,71.07 66.495,71.07 ccw(c66.495,73.61) 68.291,71.814 70.103,73.626 cw(c71.899,71.83) 71.899,74.37 91.795,74.37 cw(c91.795,71.83) 93.591,73.626 108.103,59.114 cw(c106.307,57.318) 108.847,57.318 108.847,29.522 cw(c106.307,29.522) 108.103,27.726 93.391,13.014 cw(c91.595,14.81) 91.595,12.27 83.599,12.27 cw(c83.599,14.81) 81.803,13.014 81.047,13.77 cw(c81.53,14.253) 80.847,14.253 80.847,16.07 ccw(c79.157,16.07) 80.352,17.265 80.054,17.563 ccw(c78.347,15.856) 78.347,18.27 53.499,18.27 ccw(c53.499,15.73) 51.703,17.526 51.347,17.17 ccw(c52.554,15.963) 50.847,15.963 50.847,15.17 cw(c48.674,15.17) 50.21,13.634 49.647,13.07 cw(c47.957,14.76) 47.957,12.37 39.347,12.37 cw(c39.347,12.853) 39.005,12.512 23.047,28.47 cw(c23.53,28.953) 22.847,28.953 22.847,57.905 cw(c24.213,57.905) 23.247,58.87 38.003,73.626 cw(c39.799,71.83) 39.799,74.37
NetC5_2 on Top Layer "Top Layer-NetC5_2" (solid, pour order 13): 88,35.5 100.85,35.5 100.85,48.2 97.3,48.2 92.5,48.2 92.5,68 89.25,68 88,68
no net on Top Layer "NONET_L01_P021" (solid, pour order 21): 145.2,155.4
no net on Top Layer "NONET_L01_P020" (solid, pour order 20): 64.9,71
NetC1_2 on Top Layer "NETC1_2_L01_P001" (solid, pour order 1): 30,27.5 41.85,27.5 41.85,53.25 36,53.25 36,42.5 30,42.5
no net on Top Layer "NONET_L01_P000" (solid, pour order 0): 29,27.5
+5V2 on Bottom Layer "+5V2_L04_P005" (solid, pour order 5): 85.45,65.698 85.45,51.198 108.7,51.198 108.7,47.498 77.95,47.498 77.95,65.698
+5V1 on Bottom Layer "Bottom Layer-+5V1" (solid, remove dead copper, pour order 11): 85.9,66.7 85.9,65.35 85.9,51.375 108.7,51.375 108.7,54.75 89.275,54.75 89.275,69.3 86.071,69.3 73.9,69.3 73.9,52.7 46.75,52.7 46.75,45.85 52,45.85 52,48.3 77.4,48.3 77.4,66.7
GND on Bottom Layer "GND_L04_P025" (solid, remove dead copper, pour order 25): 59.873,74.316 cw(c59.873,71.776) 61.669,73.572 63.481,71.76 ccw(c65.277,73.556) 65.277,71.016 66.373,71.016 ccw(c66.373,73.556) 68.169,71.76 69.981,73.572 cw(c71.777,71.776) 71.777,74.316 91.673,74.316 cw(c91.673,71.776) 93.469,73.572 107.981,59.06 cw(c106.185,57.264) 108.725,57.264 108.725,29.468 cw(c106.185,29.468) 107.981,27.672 93.269,12.96 cw(c91.473,14.756) 91.473,12.216 83.477,12.216 cw(c83.477,14.756) 81.681,12.96 80.925,13.716 cw(c81.408,14.199) 80.725,14.199 80.725,16.016 ccw(c79.035,16.016) 80.23,17.211 79.932,17.509 ccw(c78.225,15.802) 78.225,18.216 53.377,18.216 ccw(c53.377,15.676) 51.581,17.472 51.225,17.116 ccw(c52.432,15.909) 50.725,15.909 50.725,15.116 cw(c48.552,15.116) 50.088,13.58 49.525,13.016 cw(c47.835,14.706) 47.835,12.316 39.225,12.316 cw(c39.225,12.799) 38.883,12.458 22.925,28.416 cw(c23.408,28.899) 22.725,28.899 22.725,57.85 cw(c24.09,57.85) 23.125,58.816 37.881,73.572 cw(c39.677,71.776) 39.677,74.316
no net on Bottom Layer "NONET_L04_P026" (solid, pour order 26): 100,73.2
no net on Bottom Layer "NONET_L04_P016" (solid, pour order 16): 31.05,19.975
no net on Bottom Layer "NONET_L04_P015" (solid, pour order 15): 32.2,18.925
no net on Bottom Layer "NONET_L04_P007" (solid, pour order 7): 53.75,45.75
no net on Bottom Layer "NONET_L04_P004" (solid, pour order 4): 108,47.4
no net on Bottom Layer "NONET_L04_P003" (solid, pour order 3): 46.5,53.1
no net on Top Paste "NONET_L-01_P-001" (solid): 32.375,68.15
GND on Top Solder "NONET_L04_P-001" (solid): 92.299,74.212 ccw(c91.564,71.735) 91.626,74.318 ccw(c89.26,-276.458) 86.899,74.318 cw(c82.816,71.536) 87.753,71.337 ccw(c90.625,71.221) 90.74,68.349 98.87,68.198 93.669,73.4 93.615,73.454 93.576,73.493 93.526,73.543 93.257,73.772 ccw(c91.714,71.564) 92.702,74.07 ccw(c91.529,71.377)
GND on Top Solder "NONET_L04_P-001" (solid): 39.152,74.194 cw(c39.887,71.717) 39.825,74.3 cw(c42.19,-276.476) 44.551,74.3 ccw(c48.635,71.518) 43.698,71.318 cw(c40.826,71.203) 40.711,68.331 32.58,68.18 37.782,73.382 37.836,73.436 37.875,73.475 37.925,73.525 38.194,73.754 cw(c39.737,71.546) 38.749,74.052 cw(c39.922,71.359)
GND on Top Solder "NONET_L04_P-001" (solid): 92.203,12.4 cw(c91.518,15.055) 91.486,12.313 cw(c89.238,346.043) 86.989,12.313 ccw(c82.859,14.812) 87.665,15.266 cw(c90.651,15.267) 90.652,18.253 98.658,18.26 93.586,13.188 93.519,13.12 93.485,13.087 93.468,13.072 93.169,12.83 cw(c91.598,15.148) 92.588,12.529 cw(c91.501,15.118)
GND on Top Solder "NONET_L04_P-001" (solid): 39.208,12.387 ccw(c39.894,15.042) 39.925,12.3 ccw(c42.173,346.03) 44.423,12.3 cw(c48.553,14.8) 43.747,15.253 ccw(c40.76,15.254) 40.76,18.24 32.753,18.247 37.825,13.175 37.893,13.108 37.926,13.074 37.944,13.06 38.243,12.818 ccw(c39.813,15.136) 38.823,12.517 ccw(c39.91,15.105)
no net on Top Solder "NONET_L04_P-001" (solid): 32.8,18.2
no net on Bottom Solder "NONET_L04_P-001" (solid): 92.215,12.398 cw(c91.53,15.054) 91.498,12.311 cw(c89.25,346.041) 87.001,12.311 ccw(c82.871,14.811) 87.677,15.265 cw(c90.663,15.266) 90.664,18.252 98.67,18.258 93.598,13.186 93.531,13.119 93.497,13.085 93.48,13.071 93.181,12.829 cw(c91.61,15.147) 92.6,12.528 cw(c91.513,15.117)
no net on Bottom Solder "NONET_L04_P-001" (solid): 39.164,74.192 cw(c39.899,71.716) 39.837,74.299 cw(c42.202,-276.477) 44.563,74.299 ccw(c48.647,71.516) 43.71,71.317 cw(c40.838,71.201) 40.723,68.33 32.592,68.179 37.794,73.381 37.848,73.435 37.887,73.474 37.937,73.524 38.206,73.753 cw(c39.749,71.545) 38.761,74.051 cw(c39.934,71.357)
no net on Bottom Solder "NONET_L04_P-001" (solid): 39.22,12.386 ccw(c39.906,15.041) 39.937,12.299 ccw(c42.185,346.029) 44.435,12.299 cw(c48.565,14.798) 43.759,15.252 ccw(c40.772,15.253) 40.772,18.239 32.765,18.246 37.837,13.174 37.905,13.106 37.938,13.073 37.956,13.058 38.255,12.816 ccw(c39.825,15.134) 38.836,12.515 ccw(c39.922,15.104)
GND on Bottom Solder "NONET_L04_P-001" (solid): 92.311,74.211 ccw(c91.576,71.734) 91.638,74.317 ccw(c89.273,-276.459) 86.911,74.317 cw(c82.828,71.534) 87.765,71.335 ccw(c90.637,71.219) 90.752,68.348 98.882,68.197 93.681,73.399 93.627,73.453 93.588,73.492 93.538,73.542 93.269,73.771 ccw(c91.726,71.563) 92.714,74.069 ccw(c91.541,71.376)
GND on Ground (split plane): 271 vertices, not listed, extent 23.209,12.809 108.191,73.791
-27V1 on Power (split plane): 39.943,73.79 45.448,73.79 45.448,50.5 45.456,50.435 45.482,50.374 45.522,50.322 52.542,43.301 44.022,34.78 43.982,34.728 43.956,34.667 43.948,34.602 43.948,12.81 39.943,12.81 39.926,12.809 39.725,12.818 39.51,12.846 39.298,12.893 39.09,12.958 38.889,13.042 38.697,13.142 38.513,13.259 38.341,13.391 38.192,13.527 38.182,13.54 23.94,27.782 23.927,27.793 23.791,27.941 23.659,28.114 23.542,28.297 23.442,28.49 23.358,28.691 23.293,28.898 23.246,29.11 23.218,29.326 23.209,29.527 23.21,29.543 23.21,57.057 23.209,57.073 23.218,57.275 23.246,57.49 23.293,57.702 23.358,57.91 23.442,58.11 23.542,58.303 23.659,58.487 23.791,58.659 23.927,58.807 23.94,58.818 38.182,73.06 38.193,73.073 38.341,73.209 38.513,73.341 38.697,73.458 38.89,73.558 39.09,73.642 39.298,73.707 39.51,73.754 39.726,73.782 39.927,73.791
+5V1 on Power (split plane): 59.855,73.782 60.071,73.754 60.283,73.707 60.49,73.642 60.691,73.558 60.884,73.458 61.067,73.341 61.24,73.209 61.4,73.062 61.547,72.902 61.679,72.729 61.795,72.547 61.796,72.546 61.794,72.545 61.811,72.517 61.811,72.516 61.812,72.516 61.95,72.294 62.122,72.054 62.309,71.826 62.511,71.611 62.726,71.409 62.954,71.222 63.194,71.05 63.445,70.894 63.705,70.755 63.974,70.633 64.25,70.529 64.533,70.443 64.82,70.376 65.111,70.328 65.405,70.299 65.445,70.298 65.445,43.553 53.003,43.553 45.952,50.604 45.952,73.79 59.638,73.79 59.654,73.791
+27V1 on Power (split plane): 65.445,18.81 53.7,18.81 53.696,18.81 53.45,18.801 53.2,18.775 52.954,18.73 52.711,18.668 52.473,18.589 52.242,18.493 52.018,18.381 51.802,18.253 51.596,18.11 51.401,17.953 51.218,17.782 51.047,17.599 50.89,17.404 50.747,17.198 50.619,16.982 50.507,16.758 50.411,16.527 50.332,16.289 50.27,16.046 50.225,15.8 50.199,15.55 50.19,15.304 50.19,15.3 50.191,15.284 50.182,15.083 50.154,14.867 50.107,14.655 50.042,14.448 49.958,14.247 49.858,14.054 49.741,13.871 49.609,13.698 49.462,13.538 49.302,13.391 49.129,13.259 48.946,13.142 48.753,13.042 48.552,12.958 48.345,12.893 48.133,12.846 47.917,12.818 47.716,12.809 47.7,12.81 44.452,12.81 44.452,34.498 53.003,43.049 65.445,43.049
-27V2 on Power (split plane): 91.674,73.782 91.89,73.754 92.102,73.707 92.31,73.642 92.51,73.558 92.703,73.458 92.887,73.341 93.059,73.209 93.207,73.073 93.218,73.06 107.46,58.818 107.473,58.807 107.609,58.659 107.741,58.487 107.858,58.303 107.958,58.11 108.042,57.91 108.107,57.702 108.154,57.49 108.182,57.274 108.191,57.073 108.19,57.057 108.19,29.543 108.191,29.527 108.182,29.326 108.154,29.11 108.107,28.898 108.042,28.69 107.958,28.49 107.858,28.297 107.741,28.113 107.609,27.941 107.473,27.793 107.46,27.782 93.218,13.54 93.207,13.527 93.059,13.391 92.887,13.259 92.703,13.142 92.51,13.042 92.31,12.958 92.102,12.893 91.89,12.846 91.675,12.818 91.473,12.809 91.457,12.81 87.452,12.81 87.452,34.602 87.444,34.667 87.418,34.728 87.378,34.78 78.858,43.301 85.878,50.322 85.918,50.374 85.944,50.435 85.952,50.5 85.952,73.79 91.457,73.79 91.473,73.791
+5V2 on Power (split plane): 71.762,73.79 85.448,73.79 85.448,50.604 78.397,43.553 65.95,43.553 65.95,70.298 65.995,70.299 66.289,70.328 66.58,70.376 66.867,70.443 67.15,70.529 67.426,70.633 67.695,70.755 67.955,70.894 68.206,71.05 68.446,71.222 68.674,71.409 68.889,71.611 69.091,71.826 69.278,72.054 69.45,72.294 69.588,72.516 69.589,72.516 69.589,72.517 69.606,72.545 69.604,72.546 69.605,72.547 69.721,72.729 69.853,72.902 70,73.062 70.16,73.209 70.333,73.341 70.516,73.458 70.709,73.558 70.91,73.642 71.117,73.707 71.329,73.754 71.545,73.782 71.746,73.791
+27V2 on Power (split plane): 86.948,34.498 86.948,12.81 83.7,12.81 83.684,12.809 83.483,12.818 83.267,12.846 83.055,12.893 82.848,12.958 82.647,13.042 82.454,13.142 82.271,13.259 82.098,13.391 81.938,13.538 81.791,13.698 81.659,13.871 81.542,14.054 81.442,14.247 81.358,14.448 81.293,14.655 81.246,14.867 81.218,15.083 81.209,15.284 81.21,15.3 81.21,15.304 81.201,15.55 81.175,15.8 81.13,16.046 81.068,16.289 80.989,16.527 80.893,16.758 80.781,16.982 80.653,17.198 80.51,17.404 80.353,17.599 80.182,17.782 79.999,17.953 79.804,18.11 79.598,18.253 79.382,18.381 79.158,18.493 78.927,18.589 78.689,18.668 78.446,18.73 78.2,18.775 77.95,18.801 77.704,18.81 77.7,18.81 65.95,18.81 65.95,43.049 78.397,43.049

## Other copper
Power (plane layer: these items are gaps in the copper):
  lines w0.5: 44.2,12.351 44.2,34.602 52.899,43.301 ; 45.7,74.1 45.7,50.5 52.899,43.301 ; 65.697,18.403 65.697,70.8 ; 78.397,43.301 52.899,43.301 ; 85.7,74.1 85.7,50.5 78.501,43.301 87.2,34.602 87.2,12.351

## Silkscreen, mask and mechanical layers (free items; w line width, h text height)
Top Overlay:
  lines w0.3: 32.607,68.17 cw(c33.282,65.247) 33.282,68.247 40.725,68.247 ccw(c40.725,71.247) 43.725,71.247 43.725,72.247 cw(c46.725,72.247) 44.496,74.254 ; 32.761,18.292 ccw(c33.282,21.247) 33.282,18.247 40.725,18.247 cw(c40.725,15.247) 43.725,15.247 43.725,14.247 ccw(c46.725,14.247) 44.496,12.239 ; 86.937,74.274 cw(c84.725,72.247) 87.725,72.247 87.725,71.247 ccw(c90.725,71.247) 90.725,68.247 98.169,68.247 cw(c98.169,65.247) 98.793,68.181 ; 87.023,12.318 ccw(c84.725,14.247) 87.725,14.247 87.725,15.247 cw(c90.725,15.247) 90.725,18.247 98.169,18.247 ccw(c98.169,21.247) 98.638,18.284 ; 22.7,29.543 ccw(c25.7,29.543) 23.579,27.421 37.821,13.179 ccw(c39.943,15.3) 39.943,12.3 47.7,12.3 ccw(c47.7,15.3) 50.7,15.3 cw(c53.7,15.3) 53.7,18.3 77.7,18.3 cw(c77.7,15.3) 80.7,15.3 ccw(c83.7,15.3) 83.7,12.3 91.457,12.3 ccw(c91.457,15.3) 93.579,13.179 107.821,27.421 ccw(c105.7,29.543) 108.7,29.543 108.7,57.057 ccw(c105.7,57.057) 107.821,59.179 93.579,73.421 ccw(c91.457,71.3) 91.457,74.3 71.762,74.3 ccw(c71.762,71.3) 69.164,72.8 cw(c65.7,74.8) 62.236,72.8 ccw(c59.638,71.3) 59.638,74.3 39.943,74.3 ccw(c39.943,71.3) 37.821,73.421 23.579,59.179 ccw(c25.7,57.057) 22.7,57.057 22.7,29.543
Top Solder:
  lines w0.3: 32.607,18.324 ccw(c33.282,21.247) 33.282,18.247 40.725,18.247 cw(c40.725,15.247) 43.725,15.247 43.725,14.247 ccw(c46.725,14.247) 44.496,12.239 ; 32.607,68.17 cw(c33.282,65.247) 33.282,68.247 40.725,68.247 ccw(c40.725,71.247) 43.725,71.247 43.725,72.247 cw(c46.725,72.247) 44.496,74.254 ; 86.937,74.274 cw(c84.725,72.247) 87.725,72.247 87.725,71.247 ccw(c90.725,71.247) 90.725,68.247 98.169,68.247 cw(c98.169,65.247) 98.793,68.181 ; 87.023,12.318 ccw(c84.725,14.247) 87.725,14.247 87.725,15.247 cw(c90.725,15.247) 90.725,18.247 98.169,18.247 ccw(c98.169,21.247) 98.638,18.284
Bottom Solder:
  lines w0.3: 32.613,68.174 cw(c33.287,65.251) 33.287,68.251 40.731,68.251 ccw(c40.731,71.251) 43.731,71.251 43.731,72.251 cw(c46.731,72.251) 44.502,74.259 ; 32.767,18.297 ccw(c33.287,21.251) 33.287,18.251 40.731,18.251 cw(c40.731,15.251) 43.731,15.251 43.731,14.251 ccw(c46.731,14.251) 44.502,12.244 ; 86.943,74.278 cw(c84.731,72.251) 87.731,72.251 87.731,71.251 ccw(c90.731,71.251) 90.731,68.251 98.175,68.251 cw(c98.175,65.251) 98.799,68.186 ; 87.029,12.323 ccw(c84.731,14.251) 87.731,14.251 87.731,15.251 cw(c90.731,15.251) 90.731,18.251 98.175,18.251 ccw(c98.175,21.251) 98.644,18.288 ; 22.7,29.568 ccw(c25.7,29.568) 23.579,27.446 37.821,13.204 ccw(c39.943,15.325) 39.943,12.325 47.7,12.325 ccw(c47.7,15.325) 50.7,15.325 cw(c53.7,15.325) 53.7,18.325 77.7,18.325 cw(c77.7,15.325) 80.7,15.325 ccw(c83.7,15.325) 83.7,12.325 91.457,12.325 ccw(c91.457,15.325) 93.579,13.204 107.821,27.446 ccw(c105.7,29.568) 108.7,29.568 108.7,57.082 ccw(c105.7,57.082) 107.821,59.204 93.579,73.446 ccw(c91.457,71.325) 91.457,74.325 71.762,74.325 ccw(c71.762,71.325) 69.164,72.825 cw(c65.7,74.825) 62.236,72.825 ccw(c59.638,71.325) 59.638,74.325 39.943,74.325 ccw(c39.943,71.325) 37.821,73.446 23.579,59.204 ccw(c25.7,57.082) 22.7,57.082 22.7,29.568
Mechanical 1:
  the board outline again, w0.2
Mechanical 15:
  circle w0.2: c65.695,43.299 r1.35
  circle w0.2: c104.173,46.303 r0.432
  circle w0.2: c104.173,48.303 r0.432
  circle w0.2: c106.173,44.303 r0.432
  circle w0.2: c104.173,44.303 r0.432
  circle w0.2: c106.173,46.303 r0.432
  circle w0.2: c106.173,48.303 r0.432
  circle w0.2: c106.173,50.303 r0.432
  circle w0.2: c104.173,50.303 r0.432
  circle w0.2: c106.173,52.303 r0.432
  circle w0.2: c104.173,52.303 r0.432
  circle w0.2: c106.173,42.303 r0.432
  circle w0.2: c104.173,40.303 r0.432
  circle w0.2: c106.173,40.303 r0.432
  circle w0.2: c104.173,42.303 r0.432
  circle w0.2: c106.173,38.303 r0.432
  circle w0.2: c104.173,36.303 r0.432
  circle w0.2: c106.173,36.303 r0.432
  circle w0.2: c104.173,38.303 r0.432
  circle w0.2: c106.173,34.303 r0.432
  circle w0.2: c104.173,34.303 r0.432